# Altium PCB 封装完成1次.PcbDoc
Units mil, origin at the board's own origin, x right, y up, seen from the top; angles counter-clockwise.
Board outline 6000 x 4000 mil, 2 copper layers (Top Layer, Bottom Layer); 77 components, 59 nets, 331 pads, 24 vias.
Unrouted connection lines stored in the file: 177.
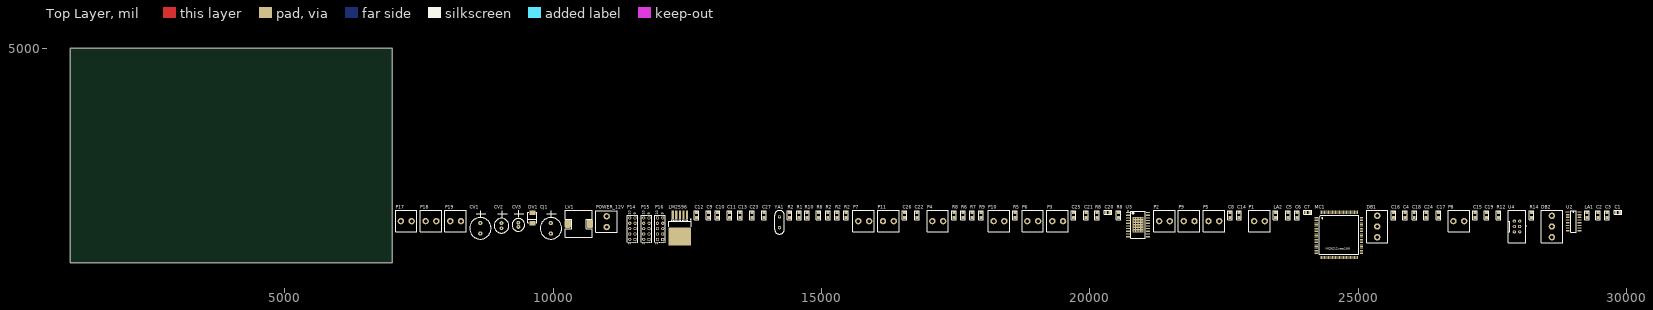
[diagram p0: Top Layer view]
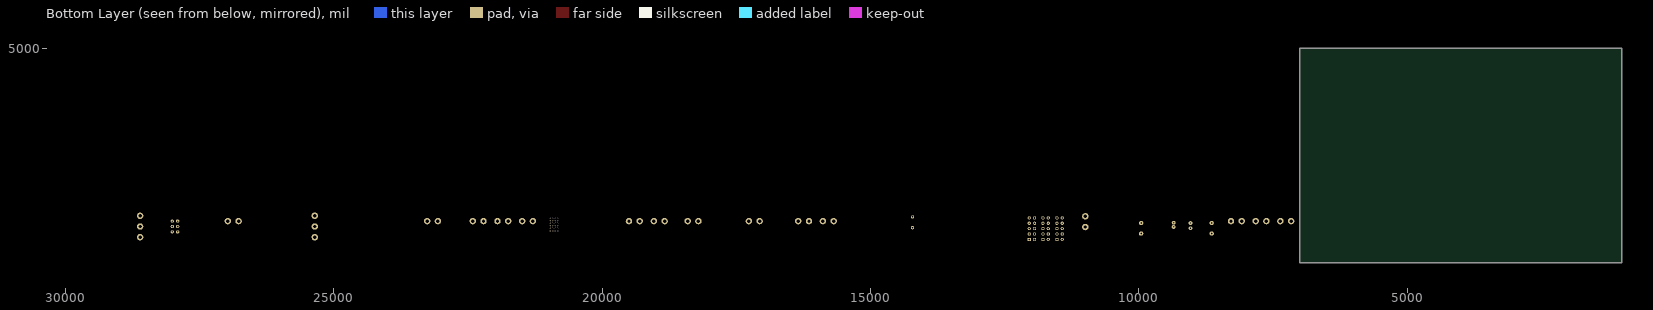
[diagram p1: Bottom Layer view, seen from below]

## Layer stack, top to bottom
Top Layer: signal copper 1.4
Dielectric: dielectric 12.6, FR-4, Dk 4.8
Bottom Layer: signal copper 1.4

## Board outline
1000,1000 7000,1000 7000,5000 1000,5000

## Design rules (kind name [scope] priority, off if disabled: settings)
Clearance [All] p1: gap=10
PolygonConnect [All] p1: connectstyle=Relief reliefconductorwidth=10 reliefentries=4 polygonreliefangle="90 Angle"
RoomDefinition SHEET1-胡晓 [InComponentClass('SHEET1-胡晓')] p1: confinementstyle=ConfineIn formatcopy=TRUE lockcomponents=FA outline 7045,1060 29920,1060 29920,2090 7045,2090
RoutingVias [All] p1: holewidth=28 width=50 viastyle="Through Hole" minholewidth=28 minwidth=50 maxholewidth=28 maxwidth=50
SilkscreenOverComponentPads [All] p1: minsilkscreentomaskgap=10
SolderMaskExpansion [All] p1: expansion=4
Width [All] p1: maxlimit=10 minlimit=10 preferedwidth=10
27 further rules are at their usual default settings.

## Classes and differential pairs
component class SHEET1-胡晓: C1 C2 C3 C4 C5 C6 C7 C8 C9 C10 C11 C12 C13 C14 C15 C16 C17 C18 C19 C20 C21 C22 C23 C24 C25 C26 C27 CJ1 CV1 CV2 CV3 DB1 DB2 DV1 LA1 LA2 LM2596 LV1 MC1 P1 P2 P3 P4 P5 P6 P7 P8 P9 P10 P11 P14 P15 P16 P17 P18 P19 POWER_12V R1 R2 R5 R6 R7 R8 R9 R10 R12 R14 U2 U3 U4 YA1

## Components (designator, comment, footprint, x,y, rotation, side; value= is the part's Value field where it differs from the comment)
C1 "CA14" LC0805-有方向的电容 29805,1945 r0 top
C2 "CA13" 0805 29470,1940 r0 top
C3 "CA12" 0805 29640,1940 r0 top
C4 "CA11" 0805 25875,1940 r0 top
C5 "CA8" 0805 23690,1940 r0 top
C6 "CA9" 0805 23860,1940 r0 top
C7 "CA10" LC0805-有方向的电容 24025,1945 r0 top
C8 "CA7" 0805 22610,1940 r0 top
C9 "CA6" 0805 12890,1940 r0 top
C10 "CA5" 0805 13060,1940 r0 top
C11 "CA4" 0805 13280,1940 r0 top
C12 "CA3" 0805 12670,1940 r0 top
C13 "CA2" 0805 13480,1940 r0 top
C14 "CA1" 0805 22780,1940 r0 top
C15 "104" 0805 27175,1940 r0 top
C16 "104" 0805 25655,1940 r0 top
C17 "104" 0805 26495,1940 r0 top
C18 "104" 0805 26045,1940 r0 top
C19 "104" 0805 27395,1940 r0 top
C20 "C20" LC0805-有方向的电容 20300,1945 r0 top
C21 "0.1uF" 0805 19925,1940 r0 top
C22 "0.1uF" 0805 16775,1940 r0 top
C23 "0.1uF" 0805 13700,1940 r0 top
C24 "Cap" 0805 26265,1940 r0 top
C25 "0.1uF" 0805 19695,1940 r0 top
C26 "0.1uF" 0805 16545,1940 r0 top
C27 "0.1uF" 0805 13930,1940 r0 top
CJ1 "50V" 470uF 9955,1745 r0 top
CV1 "Cap Pol1" 50V/330uF 8640,1745 r0 top
CV2 "Cap Pol1" 10V/330uF 9035,1745 r0 top
CV3 "Cap Pol1" 35V/10uF 9350,1750 r0 top
DB1 "DB1" kf128-3P 25355,1480 r90 top
DB2 "DB2" kf128-3P 28610,1480 r90 top
DV1 "Diode" SMB-二极管 9605,1740 r90 top
LA1 "LA2" 0805 29260,1940 r0 top
LA2 "LA1" 0805 23460,1940 r0 top
LM2596 "LM2596_5" LM2596 12360,1495 r90 top
LV1 "Inductor" 47uH 10270,1730 r0 top
MC1 "UA1" mc9s12xep100 24630,1535 r0 top
P1 "LED1" KF128-2p 23060,1780 r0 top
P2 "LED2" KF128-2p 21290,1780 r0 top
P3 "LED3" KF128-2p 19300,1780 r0 top
P4 "蜂鸣器" KF128-2p 17065,1780 r0 top
P5 "按键" KF128-2p 22210,1780 r0 top
P6 "按键" KF128-2p 18835,1780 r0 top
P7 "按键" KF128-2p 15685,1780 r0 top
P8 "复位开关" KF128-2p 26775,1780 r0 top
P9 "中断" KF128-2p 21750,1780 r0 top
P10 "中断" KF128-2p 18205,1780 r0 top
P11 "中断" KF128-2p 16145,1780 r0 top
P14 "Header 5X2" HDR2X5 11525,1440 r90 top
P15 "Header 5X2" HDR2X5 11785,1440 r90 top
P16 "Header 5X2" HDR2X5 12040,1440 r90 top
P17 "12V供电" KF128-2p 7160,1780 r0 top
P18 "12V供电" KF128-2p 7620,1780 r0 top
P19 "12V供电" KF128-2p 8080,1780 r0 top
POWER_12V "Header 2" KF128-2p 10995,1670 r90 top
R1 "RA8" 0805 14575,1940 r0 top
R2 "RA2" 0805 15115,1940 r0 top
R2 "RA2" 0805 15285,1940 r0 top
R2 "RA2" 0805 14405,1940 r0 top
R2 "RA2" 0805 15455,1940 r0 top
R5 "10K" 0805 18605,1940 r0 top
R6 "10K" 0805 17635,1940 r0 top
R7 "10K" 0805 17805,1940 r0 top
R8 "10K" 0805 17465,1940 r0 top
R8 "10K" 0805 14945,1940 r0 top
R8 "10K" 0805 20535,1940 r0 top
R8 "10K" 0805 20135,1940 r0 top
R9 "10K" 0805 17975,1940 r0 top
R10 "10K" 0805 14725,1940 r0 top
R12 "Res2" 0805 27615,1940 r0 top
R14 "Res2" 0805 28230,1940 r0 top
U2 "MAX3232C" MAX232 28905,1950 r90 top
U3 "TLE8104" TEL8104 20710,1940 r0 top
U4 "BDM" BDM 27910,1780 r90 top
YA1 "YA1" XTAL 14215,1630 r90 top

## Footprints (in the part's own frame and the unit in brackets; to place one, negate y for a bottom-side part, rotate by r counter-clockwise, add the part's x,y. Pads: shape width x height; smd on the part's side, far side on the other; paste and mask are expansions set on the pad)
10V/330uF [mil]
  round 70 hole 27.56: 1(0,0) 2(0,-98.43)
  silkscreen extent -138,-187 138,231
35V/10uF [mil]
  round 70 hole 27.56: 1(0,0) 2(0,-78.74)
  silkscreen extent -118,-157 118,231
47uH [mm]
  rrect50% 3x4 smd mask+0: 0(0,0) 1(10.518,0)
  silkscreen extent -1.14,-6.4 11.66,6.4
50V/330uF [mil]
  round 80 hole 31.5: 1(0,0) 2(0,-196.85)
  silkscreen extent -199,-299 201,231
470uF [mil]
  round 80 hole 31.5: 1(0,0) 2(0,-196.85)
  silkscreen extent -199,-299 201,231
0805 [mil]
  rect 55x55 smd: 1(0,-92) 2(0,0)
  silkscreen extent -42,-131 42,38
BDM [mil]
  round 60 hole 30: 1(0,0) 2(0,-100) 3(-100,0) 4(-100,-100) 5(-200,0) 6(-200,-100)
  silkscreen extent -400,-222 200,118
HDR2X5 [mm] "Connector; Header; 5x2 Positio"
  rect 1.5x1.5 hole 0.9: 1(0,0)
  round 1.5 hole 0.9: 2(0,2.54) 3(2.54,0) 4(2.54,2.54) 5(5.08,0) 6(5.08,2.54) 7(7.62,0) 8(7.62,2.54) 9(10.16,0) 10(10.16,2.54)
  silkscreen extent -1.27,-1.27 11.43,3.81
KF128-2p [mil]
  round 120 hole 62.99: 1(0,0) 2(200,0)
  silkscreen extent -100,-200 300,200
kf128-3P [mil]
  round 120 hole 62.99: 0(400,0) 1(0,0) 2(200,0)
  silkscreen extent -100,-200 500,200
LC0805-有方向的电容 [mm]
  rect 1.16x1.47 smd: 1(0,0) 2(1.85,0)
  silkscreen extent -0.89,-1.02 2.67,0.89
LM2596 [mm]
  rect 8.4x10.65 smd: 0(0,0)
  rect 4x1.05 smd: 1(10.3,-3.4) 2(10.3,-1.7) 3(10.3,0) 4(10.3,1.7) 5(10.3,3.4)
  silkscreen extent 4.65,-5.35 8.2,5.35
MAX232 [mil]
  oval 24x74 smd: 1(0,0) 2(-50,0) 3(-100,0) 4(-150,0) 5(-200,0) 6(-250,0) 7(-300,0) 8(-350,0) 9(-350,-220) 10(-300,-220) 11(-250,-220) 12(-200,-220) 13(-150,-220) 14(-100,-220) 15(-50,-220) 16(0,-220)
  silkscreen extent -375,-160 25,-60
mc9s12xep100 [mm]
  rect 1.6x0.34 smd: 1(-10.511,8.528) 2(-10.511,7.878) 3(-10.511,7.228) 4(-10.511,6.578) 5(-10.511,5.928) 6(-10.511,5.278) 7(-10.511,4.628) 8(-10.511,3.978) 9(-10.511,3.328) 10(-10.511,2.678) 11(-10.511,2.028) 12(-10.511,1.378) 13(-10.511,0.728) 14(-10.511,0.078) 15(-10.511,-0.572) 16(-10.511,-1.222) 17(-10.511,-1.872) 18(-10.511,-2.522) 19(-10.511,-3.172) 20(-10.511,-3.822) 21(-10.511,-4.472) 22(-10.511,-5.122) 23(-10.511,-5.772) 24(-10.511,-6.422) 25(-10.511,-7.072) 26(-10.511,-7.722) 27(-10.511,-8.372) 28(-10.511,-9.022) 57(10.939,-9.022) 58(10.939,-8.372) 59(10.939,-7.722) 60(10.939,-7.072) 61(10.939,-6.422) 62(10.939,-5.772) 63(10.939,-5.122) 64(10.939,-4.472) 65(10.939,-3.822) 66(10.939,-3.172) 67(10.939,-2.522) 68(10.939,-1.872) 69(10.939,-1.222) 70(10.939,-0.572) 71(10.939,0.078) 72(10.939,0.728) 73(10.939,1.378) 74(10.939,2.028) 75(10.939,2.678) 76(10.939,3.328) 77(10.939,3.978) 78(10.939,4.628) 79(10.939,5.278) 80(10.939,5.928) 81(10.939,6.578) 82(10.939,7.228) 83(10.939,7.878) 84(10.939,8.528)
  rect 0.34x1.6 smd: 29(-8.561,-10.972) 30(-7.911,-10.972) 31(-7.261,-10.972) 32(-6.611,-10.972) 33(-5.961,-10.972) 34(-5.311,-10.972) 35(-4.661,-10.972) 36(-4.011,-10.972) 37(-3.361,-10.972) 38(-2.711,-10.972) 39(-2.061,-10.972) 40(-1.411,-10.972) 41(-0.761,-10.972) 42(-0.111,-10.972) 43(0.539,-10.972) 44(1.189,-10.972) 45(1.839,-10.972) 46(2.489,-10.972) 47(3.139,-10.972) 48(3.789,-10.972) 49(4.439,-10.972) 50(5.089,-10.972) 51(5.739,-10.972) 52(6.389,-10.972) 53(7.039,-10.972) 54(7.689,-10.972) 55(8.339,-10.972) 56(8.989,-10.972) 85(8.989,10.478) 86(8.339,10.478) 87(7.689,10.478) 88(7.039,10.478) 89(6.389,10.478) 90(5.739,10.478) 91(5.089,10.478) 92(4.439,10.478) 93(3.789,10.478) 94(3.139,10.478) 95(2.489,10.478) 96(1.839,10.478) 97(1.189,10.478) 98(0.539,10.478) 99(-0.111,10.478) 100(-0.761,10.478) 101(-1.411,10.478) 102(-2.061,10.478) 103(-2.711,10.478) 104(-3.361,10.478) 105(-4.011,10.478) 106(-4.661,10.478) 107(-5.311,10.478) 108(-5.961,10.478) 109(-6.611,10.478) 110(-7.261,10.478) 111(-7.911,10.478) 112(-8.561,10.478)
  silkscreen extent -9.14,-9.55 9.55,9.09
SMB-二极管 [mil]
  rect 85x107.99 smd: 1(195,-5) 2(-1.85,-5)
  silkscreen extent 6,-88 203,78
TEL8104 [mm]
  oval 1.95x0.55 smd: 1(0,0) 2(0,-1.27) 3(0,-2.54) 4(0,-3.81) 5(0,-5.08) 6(0,-6.35) 7(0,-7.62) 8(0,-8.89) 9(0,-10.16) 10(0,-11.43) 11(9.5,-11.43) 12(9.5,-10.16) 13(9.5,-8.89) 14(9.5,-7.62) 15(9.5,-6.35) 16(9.5,-5.08) 17(9.5,-3.81) 18(9.5,-2.54) 19(9.5,-1.27) 20(9.5,0)
  rect 5.2x7.3 smd: 21(4.75,-5.715)
  silkscreen extent -0.12,-12.11 8.13,0.95, body extent 0.95,-12.11 8.55,0.68, height 2.55
XTAL [mil]
  round 60 hole 30: 1(28,0) 2(228,0)
  silkscreen extent -92,-92 348,92

## Part data
C15 C16 C17 C18 C19: library part CAP_1, "Capa"
C24: "Capa"
CJ1: library part "Cap Pol1", "Polarized Capacitor (Ra"
CV1 CV2 CV3: "Polarized Capacitor (Ra"
DV1: "Defau"
LM2596: library part "Header 6", "Header,"
LV1: "Ind"
P1 P2 P3 P4 P5 P6 P7 P8 P9 P10 P11 P17 P18 P19: library part "Header 2", "Header"
P14 P15 P16: "Header, 5-Pin, Dual row"
POWER_12V: "Header,"
R12 R14: "Res"
U2: library part max

## Via types
v1: diameter 25.98, hole 12.99, Top Layer to Bottom Layer, tented top, 24 vias

## Nets (pads, with @x,y where several pads share a name; then routed paths per layer and width w, separated by ;. In a path a pad name is that pad's centre, name@x,y a point inside that pad or via, vN(x,y) a via of type N, cw(c..) or ccw(c..) an arc to the next point about the centre after c; other vN are vias at no path point)
5V: C12.2 C13.1 C17.2 C19.1 C20.1 CV2.1 CV3.1 LA1.1 LA2.2 LM2596.4 MC1.41 MC1.43 P14.2 P14.4 P15.2 P15.4 P16.2 P16.4 R5.1 R6.1 R7.2 R8.2@17465,1940 R9.2 R10.2 R12.1 R14.2 U2.16 U3.4 U4.6
12V: CJ1.1 CV1.1 LM2596.1 P1.1 P2.1 P3.1 P4.1 P17.2 P18.2 P19.2 POWER_12V.2
BKGD: MC1.23 R14.1 U4.3
GND: C1.2 C2.1 C3.2 C4.2 C5.2 C6.2 C7.2 C8.1 C9.1 C10.1 C11.1 C12.1 C13.2 C14.1 C18.2 C19.2 C20.2 C21.1 C22.1 C23.1 C24.1 C25.1 C26.1 C27.1 CJ1.2 CV1.2 CV2.2 CV3.2 DB1.1 DB2.1 DV1.1 LM2596.3 LM2596.5 MC1.14 MC1.40 MC1.44 MC1.45 MC1.66 MC1.85 MC1.86 MC1.97 MC1.106 P5.1 P6.1 P7.1 P8.2 P9.1 P10.1 P11.1 P14.1 P14.3 P14.10 P15.1 P15.3 P15.10 P16.1 P16.3 P16.10 P17.1 P18.1 P19.1 POWER_12V.1 R2.2@15115,1940 U2.15 U3.1 U3.10 U3.11 U3.20 U4.2
KWH0: C21.2 MC1.52 P5.2
KWH1: C22.2 MC1.51 P6.2 R9.1
KWH2: C23.2 MC1.50 P7.2 R10.1
KWH4: C25.2 MC1.35 P9.2
KWH5: C26.2 MC1.34 P10.2
KWH6: C27.2 MC1.33 P11.2 R8.1@17465,1848
NetC1_1: C1.1 C2.2 C3.1 LA1.2 MC1.107
NetC4_1: C4.1 MC1.84
NetC5_1: C5.1 C6.1 C7.1 LA2.1 MC1.83
NetC8_2: C8.2 MC1.65
NetC9_2: C9.2 MC1.48
NetC10_2: C10.2 MC1.47 R1.2 YA1.2
NetC11_2: C11.2 MC1.46 R1.1 YA1.1
NetC14_2: C14.2 MC1.13
NetC15_1: C15.1 U2.1
NetC15_2: C15.2 U2.3
NetC16_1: C16.1 U2.4
NetC16_2: C16.2 U2.5
NetC17_1: C17.1 U2.2
NetC18_1: C18.1 U2.6
NetDB1_22: U2.7
NetDB1_23: U2.8
NetDB2_22: U2.13
NetDB2_23: U2.14
NetDV1_2: DV1.2 LM2596.2 LV1.1
NetMC1_36: MC1.36
NetMC1_37: MC1.37
NetMC1_38: MC1.38
NetMC1_39: MC1.39 R2.1@15115,1848
NetR5_2: R5.2 U3.5
NetR6_2: R6.2 U3.7
NetR7_1: R7.1 U3.14
OUT1: P1.2 U3.3
OUT2: P2.2 U3.8
OUT3: P3.2 U3.13
OUT4: P4.2 U3.18
PA0: MC1.57 U3.9
PA1: MC1.58 U3.2
PA2: MC1.59 U3.19
PA3: MC1.60 U3.12
PB0: MC1.24 P14.5
PB1: MC1.25 P14.6
PB2: MC1.26 P14.8
PB3: MC1.27 P15.5
PB4: MC1.28 P15.6
PB5: MC1.29 P15.8
PK0: MC1.8 P16.5
PK1: MC1.7 P16.6
PK2: MC1.6 P16.8
R\E\S\E\T\: C24.2 P8.1 R12.2 U4.4
RESET: MC1.42
RXD0: MC1.89 U2.12
RXD1: MC1.91 U2.9
TXD0: MC1.90 U2.11
TXD1: MC1.92 U2.10
pads on no net: DB1.0 DB1.2 DB2.0 DB2.2 LM2596.0 LV1.0 MC1.1 MC1.2 MC1.3 MC1.4 MC1.5 MC1.9 MC1.10 MC1.11 MC1.12 MC1.15 MC1.16 MC1.17 MC1.18 MC1.19 MC1.20 MC1.21 MC1.22 MC1.30 MC1.31 MC1.32 MC1.49 MC1.53 MC1.54 MC1.55 MC1.56 MC1.61 MC1.62 MC1.63 MC1.64 MC1.67 MC1.68 MC1.69 MC1.70 MC1.71 MC1.72 MC1.73 MC1.74 MC1.75 MC1.76 MC1.77 MC1.78 MC1.79 MC1.80 MC1.81 MC1.82 MC1.87 MC1.88 MC1.93 MC1.94 MC1.95 MC1.96 MC1.98 MC1.99 MC1.100 MC1.101 MC1.102 MC1.103 MC1.104 MC1.105 MC1.108 MC1.109 MC1.110 MC1.111 MC1.112 P14.7 P14.9 P15.7 P15.9 P16.7 P16.9 R2.1@14405,1848 R2.1@15285,1848 R2.1@15455,1848 R2.2@14405,1940 R2.2@15285,1940 R2.2@15455,1940 R8.1@14945,1848 R8.1@20135,1848 R8.1@20535,1848 R8.2@14945,1940 R8.2@20135,1940 R8.2@20535,1940 U3.6 U3.15 U3.16 U3.17 U3.21 U4.1 U4.5
copper on no net:
  other v1: 20826.14,1596.89 20873.39,1596.89 20920.63,1596.89 20967.87,1596.89 20826.14,1644.13 20873.39,1644.13 20920.63,1644.13 20967.87,1644.13 20826.14,1691.38 20873.39,1691.38 20920.63,1691.38 20967.87,1691.38 20826.14,1738.62 20873.39,1738.62 20920.63,1738.62 20967.87,1738.62 20826.14,1785.87 20873.39,1785.87 20920.63,1785.87 20967.87,1785.87 20826.14,1833.11 20873.39,1833.11 20920.63,1833.11 20967.87,1833.11

## Text inside footprints (layer, text, board x,y; h text height)
MC1: Top Overlay "MC9S12xep100" at 24399,1243 h40
P14: Top Overlay "10" at 11445,1900 h50 r90; Top Overlay "9" at 11545,1900 h50 r90; Top Overlay "1" at 11545,1360 h50 r90; Top Overlay "2" at 11445,1340 h50 r90
P15: Top Overlay "10" at 11705,1900 h50 r90; Top Overlay "9" at 11805,1900 h50 r90; Top Overlay "1" at 11805,1360 h50 r90; Top Overlay "2" at 11705,1340 h50 r90
P16: Top Overlay "10" at 11960,1900 h50 r90; Top Overlay "9" at 12060,1900 h50 r90; Top Overlay "1" at 12060,1360 h50 r90; Top Overlay "2" at 11960,1340 h50 r90